# Altium PCB FT232_USB_8DAQ.PcbDoc (part 3 of 3)
Units mil, origin at the board's own origin, x right, y up, seen from the top; angles counter-clockwise.
Board outline 5020 x 4715 mil, 2 copper layers (Top Layer, Bottom Layer); 100 components, 0 nets, 361 pads, 148 vias.
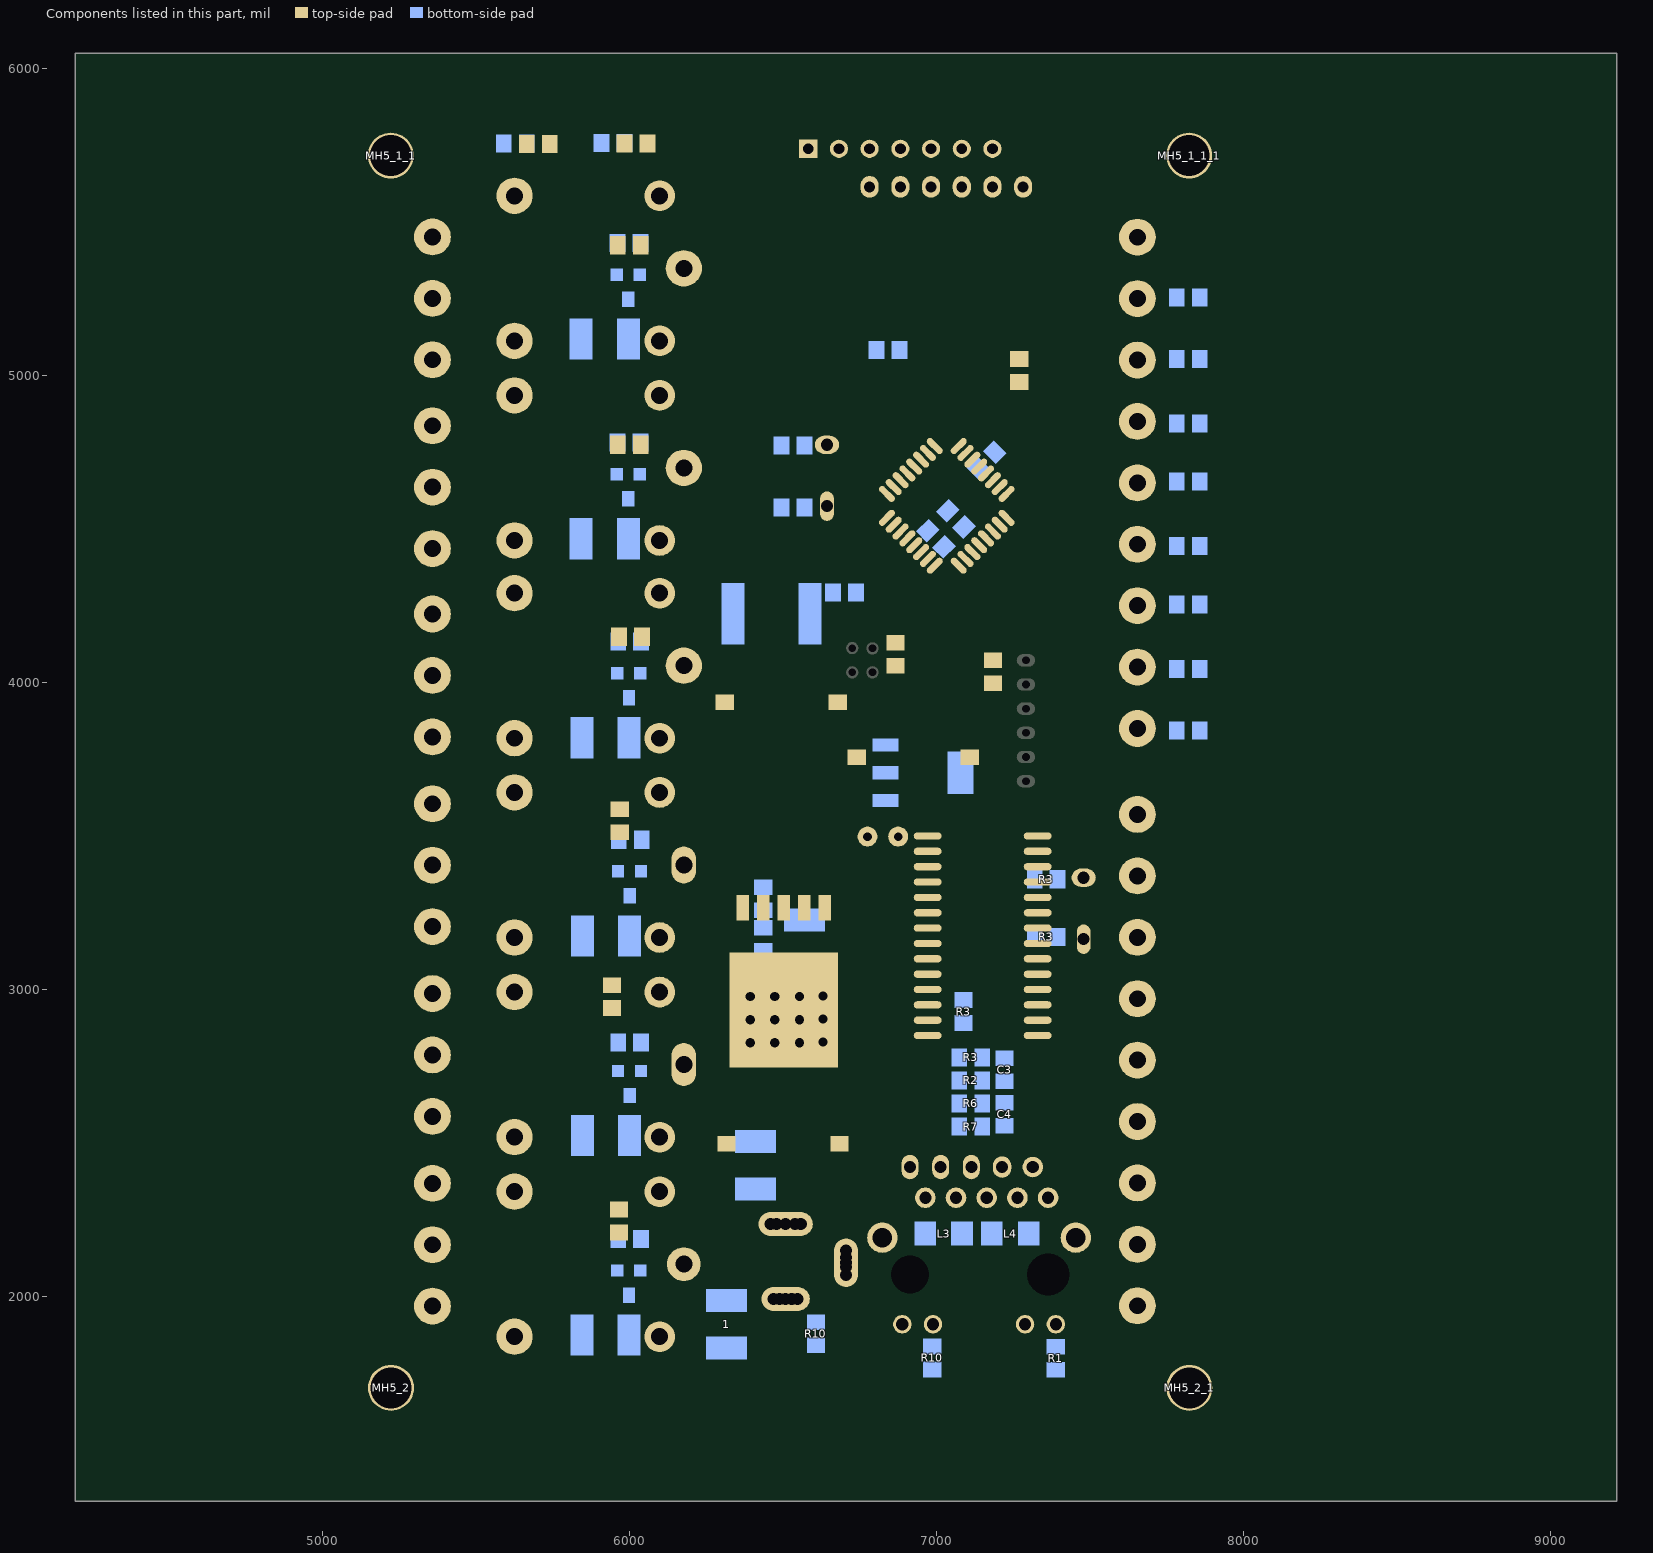
[diagram p3: the components of this part, seen from the top]

## Via types
v1: diameter 30, hole 19.68, Top Layer to Bottom Layer, tented both sides, 81 vias
v2: diameter 23.62, hole 11.81, Top Layer to Bottom Layer, 32 vias
v3: diameter 30, hole 19.68, Top Layer to Bottom Layer, 20 vias
v4: diameter 30, hole 19.68, Top Layer to Bottom Layer, tented top, 15 vias

## Nets (pads, with @x,y where several pads share a name; then routed paths per layer and width w, separated by ;. In a path a pad name is that pad's centre, name@x,y a point inside that pad or via, vN(x,y) a via of type N, cw(c..) or ccw(c..) an arc to the next point about the centre after c; other vN are vias at no path point) (continued)
copper on no net: (continued)
  Top Layer w100: 5358.3,5251.86 5484.86,5251.86 5544.86,5311.86 6139.16,5311.86 6176.85,5349.55 ; 5358.3,5456 5495,5456 5619.77,5580.77 5628.67,5580.77 ; 5360.3,5050.86 5482.86,5050.86 5545.33,5113.33 5625.67,5113.33 ; 5360.39,2362.77 5591.39,2362.77 5620.8,2333.36 ; 5361.3,2582.86 5561.14,2582.86 5628.67,2515.33 ; 5361.3,2782.86 5849.3,2782.86 5880.61,2751.55 6166.3,2751.55 ; 5361.3,3600.86 5605.3,3600.86 5624.67,3620.23 5624.67,3636.86 ; 5361.3,4218.86 5560.76,4218.86 5628.67,4286.77 ; 5361.3,4831.86 5529.76,4831.86 5628.67,4930.77 ; 5364.3,1970.86 5512.3,1970.86 5616.83,1866.33 ; 5365.83,3814.33 5628.67,3814.33 ; 5366.21,2987.77 5628.67,2987.77 ; 5367.3,2170.86 5540.3,2170.86 5608.61,2102.55 6179.85,2102.55 ; 5369,3198 5402.14,3164.86 5630.3,3164.86 ; 5370.3,4430.86 5601.3,4430.86 ; 5372.61,3401.55 6164.3,3401.55 ; 5391.3,4661.86 6137.86,4661.86 6183,4707 ; 5601.3,4435.86 5626.3,4460.86 ; 6468.93,1993.14 6468.93,1994.86 6695.3,1994.86 ; 6695.3,1626.86 6695.3,2150.62
  Bottom Layer w15: 7148.7,2554.86 7148.7,2629.86 7218.9,2629.86 7221.3,2632.26
  Bottom Layer w20: 5590.6,5838.6 5594,5842 ; v1@5734,5757 5807,5684 6342,5684 6391,5635 6391,4460 6566,4285 6566,4274 ; 5908,5758.6 5908.6,5758 ; 5958.3,5328.86 5960.9,5331.46 ; 6033.3,5429.46 6035.7,5431.86 ; v1@6064,5746 6377,5746 6438,5685 6438,4481 6531.14,4387.86 v1(6863.3,4387.86) ; 6494.9,4570.86 6494.9,4772.86 6494.9,5831.9 6501,5838 ; 6569.7,4570.86 6573.84,4575 ; 6569.7,4772.86 6571.84,4775 ; 6586.3,3095.86 6592.3,3089.86 ; 6650.3,3352.86 6650.3,3622.86 ; 6682,4998 6682,5739 ; 6752,4293 6795,4293 ; 6782,5739 6782,5063 6847,4998 7351,4998 7675,4674 7675,4646 ; 6788,4464 6788,4892 ; v1@6795,4323 6795,4228 6965,4058 7033,4058 v1(7034,4057) ; v1(6819,2891) 6831,2903 v1(6913,2903) ; v1@6832,4277 v1(6997,4112) ; 6847,4469 6847,4879 ; v1(6859,3950) 7088,3950 7215,3823 7279.96,3758.04 7291,3758.04 ; v1(6876.5,4307.5) v1(6922,4262) ; 6882,5739 6882,5204 7003,5083 7417,5083 7558,4942 7659,4841 ; 6888.3,1910.86 6891.3,1907.86 ; 6913.3,2422.86 6913.3,2735.3 6957.86,2779.86 v4@7073.9,2779.86 ; v1(6923,3897) 7073.3,3897 7179,3791.3 7291,3679.3 ; v1(6961,3998) 7108,3998 7269.22,3836.78 7291,3836.78 ; 6982,5723 6982,5739 6982,5253 7072,5163 7542,5163 7654,5051 ; 7013.3,2422.86 7013.3,2480 6983,2510.3 6983,2673 7014.86,2704.86 v4@7073.9,2704.86 ; 7024.45,4442.55 7089.45,4507.55 ; 7082,5739 7082,5311 7134,5259 7646,5259 7654,5251 ; v1(7124,4953) 7267,4953 v1(7267,4955) ; 7157,2784 7148.7,2775.7 7148.7,2704.86 7218.9,2704.86 ; 7203,4750 7211,4742 7211,4734 7419,4526 7419,3973 7361.52,3915.52 7291,3915.52 ; v1@7210,3086 7210,2996 7319,2887 7319,2827 7319,2739 7284.86,2704.86 7218.9,2704.86 ; 7221.3,2702.46 7218.9,2704.86 ; 7319.3,3360.14 7319.3,3517.3
  Bottom Layer w30: 5590.6,5756 5590.6,5838.6 ; 5908,5758.6 5908,5835 ; 5960.9,5331.46 v3@5960.9,5431.86 ; 6033.3,5328.86 6033.3,5429.46 ; 6601,3808 6611.45,3797.55 6796.95,3797.55 ; 6621,3048 6772,3048 ; 6644,4033 6790.37,4033 6791.22,4033.85 ; 6828,2189.86 6979.3,2189.86 ; 6833.95,3707 7041.05,3707 ; 6898,4442 7122,4218 7122,4090 7217.74,3994.26 7291,3994.26 ; v1(7233,2561) 7767,2561 ; 7300,2190.86 7451.3,2190.86
  Bottom Layer w35: 6852,4697.55 7136.55,4697.55
  Bottom Layer w40: v1(5133.3,5716.86) v2@5134.3,5715.86 ; 5958.3,4683.86 v3@5958.3,4785.86 ; 5960.3,2085.86 5960.3,2187.86 ; 5960.3,4030.86 5960.3,4132.86 ; 5962.3,2735.86 5962.3,2837.86 ; 5962.3,3385.86 5962.3,3487.86 ; 5987,5113 6098.11,5113 6098.11,5113.33 ; 5993.3,4474.86 5995.3,4476.86 5995.3,4604.86 ; 5996.3,5131 5996.3,5248.86 ; 5997.3,1878.86 5997.3,2006.86 ; 5997.3,3823.86 5997.3,3951.86 ; 5999.3,2528.86 5999.3,2656.86 ; 5999.3,3178.86 5999.3,3306.86 ; 6032,5459 6290.3,5459 6290.3,4764.86 6290.3,2679.86 6290.3,2381.79 6096.37,2187.86 6042.3,2187.86 ; 6033.3,4683.86 6033.3,4787.86 6034.3,4788.86 ; 6035.3,2085.86 6035.3,2184.86 ; 6035.3,4030.86 6035.3,4134.86 ; 6037.3,2735.86 6037.3,2839.86 ; 6037.3,3385.86 6037.3,3489.86 ; 6039.3,4789.86 6076.3,4826.86 6289.52,4826.86 ; 6039.7,2838.86 6083.7,2882.86 6290.3,2882.86 ; 6041.3,3486.86 6091.3,3536.86 6290.3,3536.86 ; 6041.3,4134.86 6085.3,4178.86 6290.3,4178.86 ; v3@6297.3,3939.86 6311.25,3939.86 v3(6311.25,3939.41) ; 6435.3,3334.26 6359.3,3410.26 6359.3,3842.86 6437.3,3920.86 6661.3,3920.86 ; 6611.3,3923.86 6615.85,3928.41 ; 6617.3,3932.86 6617.3,4234.86 ; v4@6624.3,3523.86 6624.3,3919.96 6615.85,3928.41 ; v1(6669,4431) 6669,4447 6916,4447 6964.45,4495.45 6971.55,4495.45 ; v3(6677.25,3928.41) 6615.85,3928.41 ; 6698,1979 7080,1979 7130,2029 7130,2204 ; 6775,3076 6775,3619 6854,3619 ; v1@6822,2894 6831,2903 v1(6913,2903) ; 6986,1838.4 6988.3,1840.7 6988.3,1910.86 ; 7083,2206 7180,2206 ; 7148.7,2629.86 7218.9,2629.86 7221.3,2632.26 ; 7148.7,2704.86 7226,2704.86 ; 7319.3,3360.14 7319.3,3172.14 7319,3171.84 7319,3001.86 7414.14,3001.86 7417,2999 ; 7388,1837.4 7388,1910.56 7388.3,1910.86 ; 7394.1,3172.14 7475.14,3172.14 7479,3176 ; 7394.1,3360.14 7398.96,3365 7479,3365 ; 7639,1956 7654,1971 ; 7639,3841 7778.04,3841 7781.9,3844.86 ; 7654,4051 7660.14,4044.86 7781.9,4044.86 ; 7654,4251 7657.86,4254.86 7781.9,4254.86 ; 7654,5251 7778.04,5251 7781.9,5254.86 ; 7657.86,5054.86 7781.9,5054.86 ; 7659,4461 7675.14,4444.86 7781.9,4444.86 ; 7662.86,4844.86 7781.9,4844.86 ; 7698,4651 7778.04,4651 7781.9,4654.86 ; v1(7733.3,5716.86) v2@7734.3,5715.86 ; v1@7856.7,3844.86 v1@7856.7,5254.86
  Bottom Layer w50: v4(6439.3,3618.86) 6439.3,3467.86 6557.3,3349.86 v3@6557.3,3242.86 ; 6571.84,4775 6643,4775 ; 6573.84,4575 6632,4575 ; 6604.3,1783.86 6604.3,1839.46 cw(c6607.3,1839.46) 6607.3,1842.46 ; 6607.3,1917.26 ccw(c6607.3,1918.26) 6608.3,1918.26 6608.3,1983.86 ; 7148.7,2554.86 7148.7,2629.86 ; 7148.7,2707 7148.7,2775.7
  Bottom Layer w60: 6410.3,2505.63 6649.77,2505.63 6745,2600.86 v4@6745,2648
  Bottom Layer w70: 6378.53,2167.09 6378.53,2343.86 ; 6433.3,2219.86 6440.53,2227.09 6440.53,2347.86
  Bottom Layer w80: 5347,4224 5507.9,4224 ccw(c5507.9,4344.71) 5593.25,4259.36 5625.67,4291.77 ; 5358.3,1969.86 5476.14,1969.86 cw(c5476.14,1849.15) 5561.5,1934.5 5625.67,1870.33 ; 5358.3,2369.86 5560.28,2369.86 cw(c5560.28,2277.38) 5625.67,2342.77 ; 5358.3,2587.86 5508.14,2587.86 cw(c5508.14,2467.15) 5593.5,2552.5 5625.67,2520.33 ; 5358.3,2987.86 cw(c5370.16,2976) 5370.16,2992.77 5625.67,2992.77 ; 5358.3,3205.86 5358.47,3205.69 ccw(c5443.83,3291.04) 5443.83,3170.33 5625.67,3170.33 ; 5358.3,3605.86 5538.76,3605.86 ccw(c5538.76,3726.57) 5624.11,3641.22 5625.67,3642.77 ; 5358.3,3823.86 ccw(c5369.23,3834.79) 5369.23,3819.33 5625.67,3819.33 ; 5358.3,4436.86 5561.76,4436.86 ccw(c5561.76,4527.24) 5625.67,4463.33 ; 5358.3,4836.86 5476.76,4836.86 ccw(c5476.76,4957.57) 5562.11,4872.22 5625.67,4935.77 ; 5358.3,5051.86 5477.27,5051.86 ccw(c5477.27,5261.73) 5625.67,5113.33 ; 5358.3,5451.86 5441.76,5451.86 ccw(c5441.76,5572.57) 5527.11,5487.22 5625.67,5585.77 ; 6853,4475 6853,4860 7327,4860 7522,4665 7522,4012 7522,3606 7648,3606 7669,3585
  Bottom Layer w100: 5813.49,2344.86 6097.3,2344.86 ; 5813.49,3643.86 6097.3,3643.86 ; 5814.3,1861.86 5814.3,5586.77 6094.11,5586.77 ; 5814.3,1924.86 5814.3,1701 6373,1701 ; 5814.3,4937.77 6098.11,4937.77 ; 5815.49,2992.86 6099.3,2992.86 ; 5815.49,4293.86 6099.3,4293.86 ; 5817.3,1861.86 5821.3,1857.86 ; 6012.3,4470.86 6014.3,4472.86 6093.3,4472.86 ; 6018.3,1872.86 6097.3,1872.86 ; 6019.3,2520.86 6098.3,2520.86 ; 6019.3,3170.86 6098.3,3170.86 ; 6019.3,3819.86 6098.3,3819.86 ; 6098.11,2343.77 6098.11,2343.86 ; 6314.3,2003.86 6314.3,2102.86 6448.67,2237.23 6557.51,2237.23 ; 6473.77,1988.3 6707.3,1988.3 6707.3,2148.47 6705.15,2150.62
  other v1: 5223.3,1613.86 7823.3,1613.86 5287.3,1640.86 7887.3,1640.86 5158.3,1642.86 7758.3,1642.86 5134.3,1703.86 5312.3,1703.86 7734.3,1703.86 7912.3,1703.86 7391.3,1753.46 6989.3,1754.46 5288.3,1765.86 7888.3,1765.86 5163.3,1768.86 7763.3,1768.86 5223.3,1793.86 7823.3,1793.86 7203.3,2698.86 7320,2851 7324.3,3001.86 7329,3178 6772,3424 7082,3754 7100,3754 7849.7,3845.86 7862,4052 7862,4262 7862,4442 7049.3,4570.86 7862,4652 6847,4745 7862,4842 7862,5052 6878,5067 7269,5076 7862,5252 5222.3,5626.86 7822.3,5626.86 5282.3,5651.86 7882.3,5651.86 5157.3,5654.86 7757.3,5654.86 5311.3,5716.86 7911.3,5716.86 6061.3,5746.86 5734.3,5754.86 5667.3,5755.86 5985.3,5756.86 5287.3,5777.86 7887.3,5777.86 5158.3,5779.86 7758.3,5779.86 5222.3,5806.86 7822.3,5806.86
  other v2: 5223.3,1617.25 7823.3,1617.25 5162.05,1642.61 5284.55,1642.61 7762.05,1642.61 7884.55,1642.61 5136.69,1703.86 5309.91,1703.86 7736.69,1703.86 7909.91,1703.86 5162.05,1765.11 5284.55,1765.11 7762.05,1765.11 7884.55,1765.11 5223.3,1790.47 7823.3,1790.47 5222.3,5630.25 7822.3,5630.25 5161.05,5655.61 5283.55,5655.61 7761.05,5655.61 7883.55,5655.61 5135.69,5716.86 5308.91,5716.86 7735.69,5716.86 7908.91,5716.86 5161.05,5778.11 5283.55,5778.11 7761.05,5778.11 7883.55,5778.11 5222.3,5803.47 7822.3,5803.47
  other v3: 6366.79,2500.86 6395.79,2500.86 6290.25,2911.41 6290.25,2952.41 6290.25,3001.41 6289.25,3049.41 6597.25,3071.41 6546.25,3072.41 6289.25,3098.41 6434.25,3102.41 6437.25,3232.41 6569.25,3242.41 5966.25,3511.41 5964.25,4154.41 5961.9,5424.86
  other v4: 7076,2555 6746,2641 6441.3,3522.86 6624.3,3531.86 6441.3,3554.86 6624.3,3563.86 6440.3,3586.86 6623.3,3595.86 6622.3,3627.86

## Other copper
Top Layer:
  rectangle: 4744,5556 5441,5847
  rectangle: 7597,5393 8141,5847
  rectangle: 7829,1563 8272,5848
  rectangle: 4744,1562 5149,5847
  rectangle: 4744,1562 8114,1752
  rectangle: 6266.3,2881.86 6679.3,3123.86
  rectangle: 6414.3,3211.86 6456.3,3226.86
  rectangle: 5933.3,3965.86 6152.3,4061.86
  rectangle: 5352.3,3966.86 5561.3,4061.29
  region: 7661.5,1729.5 7914.5,1982.5 7949.5,1982.5 7964.5,1967.5 7964.5,1712.5
  region: 5138.5,1952.5 5391.5,1699.5 5391.5,1664.5 5376.5,1649.5 5121.5,1649.5
  region: 5317.5,5623.5 5064.5,5370.5 5029.5,5370.5 5014.5,5385.5 5014.5,5640.5
  region: 7877.5,5211.5 7624.5,5464.5 7624.5,5499.5 7639.5,5514.5 7894.5,5514.5
  region: 6152.3,3965.86 6211.3,4024.86 6211.3,4074.86 6164.3,4027.86 6085.3,4027.86
  text "IP Automation™" at 7043,5347.8 h60
  text "P.Mansournia" at 5576.3,3994.86 h60
Bottom Layer:
  rectangle: 6648,4439 6931,4476
  rectangle: 7198,5434 7468,5558
  rectangle: 7059,5594 7104,5751
  rectangle: 6959,5593 7004,5750
  rectangle: 6760,5594 6805,5751
  rectangle: 6858,5592 6903,5749
  rectangle: 7137,5413 7226,5660
  rectangle: 7137,5358 7340,5438
  rectangle: 6534,5793 7373,5839
  rectangle: 7340,5358 8044,5840
  rectangle: 6648,4893 6718,5765
  rectangle: 6748,4469 6847,4899
  rectangle: 6501,5689 6609,5838
  rectangle: 6772,3049 6992,3424
  rectangle: 6685,2984 6992,3131
  rectangle: 6794.64,1631 7595,1699
  rectangle: 7340,3441 7437,3604
  rectangle: 7150,3140 7340,3604
  rectangle: 7080,3060 7222,3104
  rectangle: 7036,3060 7102,3675
  rectangle: 7313,2994 7361,3043
  rectangle: 5765,1571 7629,1631
  rectangle: 4743,5548 5437,5854
  rectangle: 7361,2500 8026,3043
  rectangle: 7592,3108 7814,3646
  rectangle: 7591,1891 7819,2429
  rectangle: 5765,1631 6794.64,1711
  rectangle: 7899,1561 8271,5854
  rectangle: 4741,1561 5138,5854
  rectangle: 4743,5827.1 8271,5854
  rectangle: 7039,3640 7133,3775
  rectangle: 6283.3,2734.86 6693.3,3129.86
  rectangle: 6247.3,1650.86 6794.64,1815.86
  rectangle: 6531,3486 6689,4325
  rectangle: 7474,1572 7636,2031
  region: 5060.5,2036.5 5313.5,1783.5 5313.5,1748.5 5298.5,1733.5 5043.5,1733.5
  region: 5340.5,5636.5 5087.5,5383.5 5052.5,5383.5 5037.5,5398.5 5037.5,5653.5
  region: 6498,5739 6397,5840 6398,5841 6516,5841
  region: 6609,5689 6496,5576 6496,5721 6489,5728
  region: 6299,2613 6459,2773 6459,2803 6448,2792 6290.3,2792
  region: 6789,3245 6789,3244 6573,3028 6775,3028 6820,3073
  region: 6822,3008 6652,2838 6553,2838 6574,2859 6574,2998
  region: 7036,3060 7066,3030 7194,3030 7197,3033 7142,3088 7140,3088
  region: 7204,2988 7118,3074 7118,3089 7121,3086 7210,3086
  region: 7233,3164 7238,3164 7319,3083 7319,3160
  region: 6841,4901 6841,4893 6847,4893 6854,4900
  region: 6648,4476 6781,4600 6840,4600 6840,4521 6760,4441
  region: 6648,4893 6855,4688 6855,4778 6662,4971
  region: 6841,4885 6841,4901 6687,5055 6679,5047 6679,4871
  region: 7535,3771 7696,3610 7696,3569 7692,3573 7540,3573
  region: 7482,3615 7482,3544 7664,3362 7741,3362 7740,3363 7740,3560
  region: 6684.3,3520.86 6684.3,3306.86 6617.3,3370.86 6532.3,3458.86 6533.3,3577.86
  region: 7474,2031 7677,2234 7730,2234 7652,2156 7652,1962
  region: 7734,1931 7587,1784 7526,1784 7526,1880 7590,1944

## Silkscreen, mask and mechanical layers (free items; w line width, h text height)
Top Overlay:
  drawing of 11533 lines, arcs and shapes, not listed
  text "LED_Status" at 6110,5736 h40
  text "RF_ASK" at 7268,5721 h40
  text "Xbee" at 6569,5598 h40
  text "NC-C-N0" at 4859.3,5473.86 h70 r270
  text "GND" at 8099,5436 h40
  text "Relay 1" at 4777.3,5389.86 h50 r270
  text "MANUFACTURE" at 6306.48,5342.36 h40
  text "DATE" at 6307.58,5275.56 h40
  text "IN-1" at 8104,5231 h40
  text "2" at 7498.58,5044 h60 r90
  text "IN-2" at 8104,5031 h40
  text "NC-C-N0" at 4858.3,4860.86 h70 r270
  text "IN-3" at 8104,4826 h40
  text "Relay 2" at 4776.3,4766.86 h50 r270
  text "IN-4" at 8104,4636 h40
  text "5" at 7502.58,4442 h60 r90
  text "IN-5" at 8104,4426 h40
  text "NC-C-N0" at 4858.3,4244.86 h70 r270
  text "IN-6" at 8104,4236 h40
  text "Relay 3" at 4776.3,4150.86 h50 r270
  text "GND" at 7357,4049 h40
  text "IN-7" at 8104,4026 h40
  text "8" at 7496.58,3841 h60 r90
  text "IN-8" at 8104,3831 h40
  text "NC-C-N0" at 4858.3,3634.86 h70 r270
  text "VCC" at 8109,3550 h40
  text "Relay 4" at 4776.3,3540.86 h50 r270
  text "VCC" at 8109,3350 h40
  text "VCC" at 8109,3150 h40
  text "NC-C-N0" at 4858.3,3009.86 h70 r270
  text "GND" at 8110,2956 h40
  text "Relay 5" at 4776.3,2915.86 h50 r270
  text "GND" at 8110,2756 h40
  text "GND" at 8109,2556 h40
  text "NC-C-N0" at 4858.3,2389.86 h70 r270
  text "+12V" at 8099,2361 h40
  text "Relay 6" at 4776.3,2305.86 h50 r270
  text "+12V" at 8099,2161 h40
  text "+12V" at 8099,1951 h40
  text "ZSP ©" at 5489,1598 h212.6
  text "12VDC-2A" at 6315.6,1595 h90
Top Solder:
  drawing of 1490 lines, arcs and shapes, not listed
  text "IP Automation™" at 7042,5345.2 h60
Bottom Solder:
  rectangle: 6393.3,2830.22 6630.47,2977.86

## Text inside footprints (layer, text, board x,y; h text height)
PBFREE: Top Overlay "Pb" at 7239,2590 h120
?: Top Overlay "Y" at 6899.3,1779.86 h70; Top Overlay "G" at 7311.3,1778.86 h70
?: Bottom Overlay "C" at 5978.3,5183.86 h40 r270; Bottom Overlay "E" at 6013.3,5363.86 h40 r270; Bottom Overlay "B" at 5938.3,5363.86 h40 r270
?: Bottom Overlay "C" at 5980.3,1940.86 h40 r270; Bottom Overlay "E" at 6015.3,2120.86 h40 r270; Bottom Overlay "B" at 5940.3,2120.86 h40 r270
?: Bottom Overlay "C" at 5982.3,2590.86 h40 r270; Bottom Overlay "E" at 6017.3,2770.86 h40 r270; Bottom Overlay "B" at 5942.3,2770.86 h40 r270
?: Bottom Overlay "C" at 5982.3,3240.86 h40 r270; Bottom Overlay "E" at 6017.3,3420.86 h40 r270; Bottom Overlay "B" at 5942.3,3420.86 h40 r270
?: Bottom Overlay "C" at 5980.3,3885.86 h40 r270; Bottom Overlay "E" at 6015.3,4065.86 h40 r270; Bottom Overlay "B" at 5940.3,4065.86 h40 r270
?: Bottom Overlay "C" at 5978.3,4533.86 h40 r270; Bottom Overlay "E" at 6013.3,4713.86 h40 r270; Bottom Overlay "B" at 5938.3,4713.86 h40 r270